# EAGLE board MD2019 (EAGLE 9.3.1)
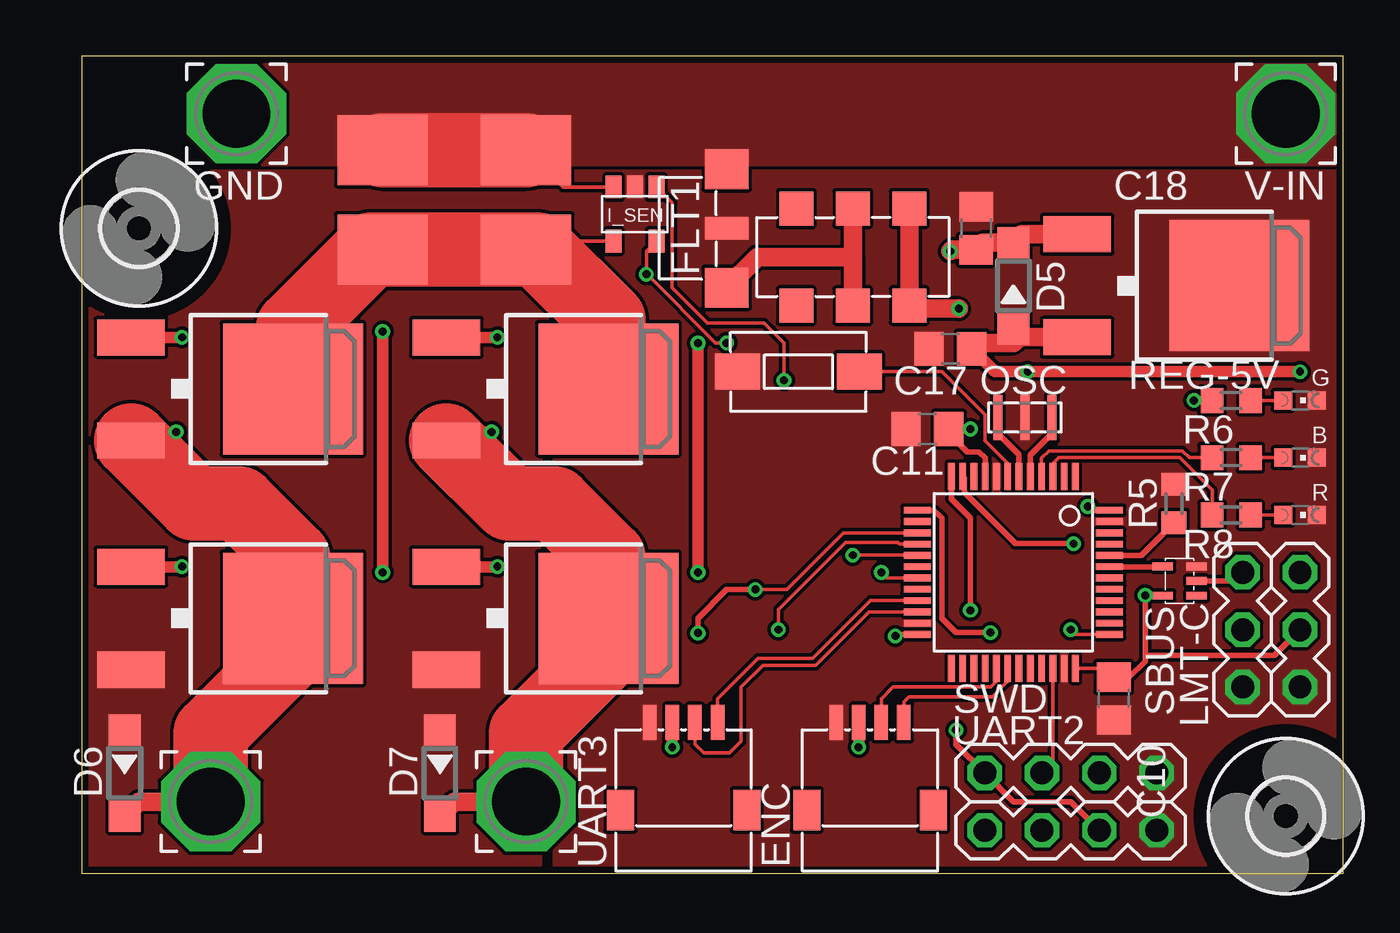
[diagram p0: board, top side]
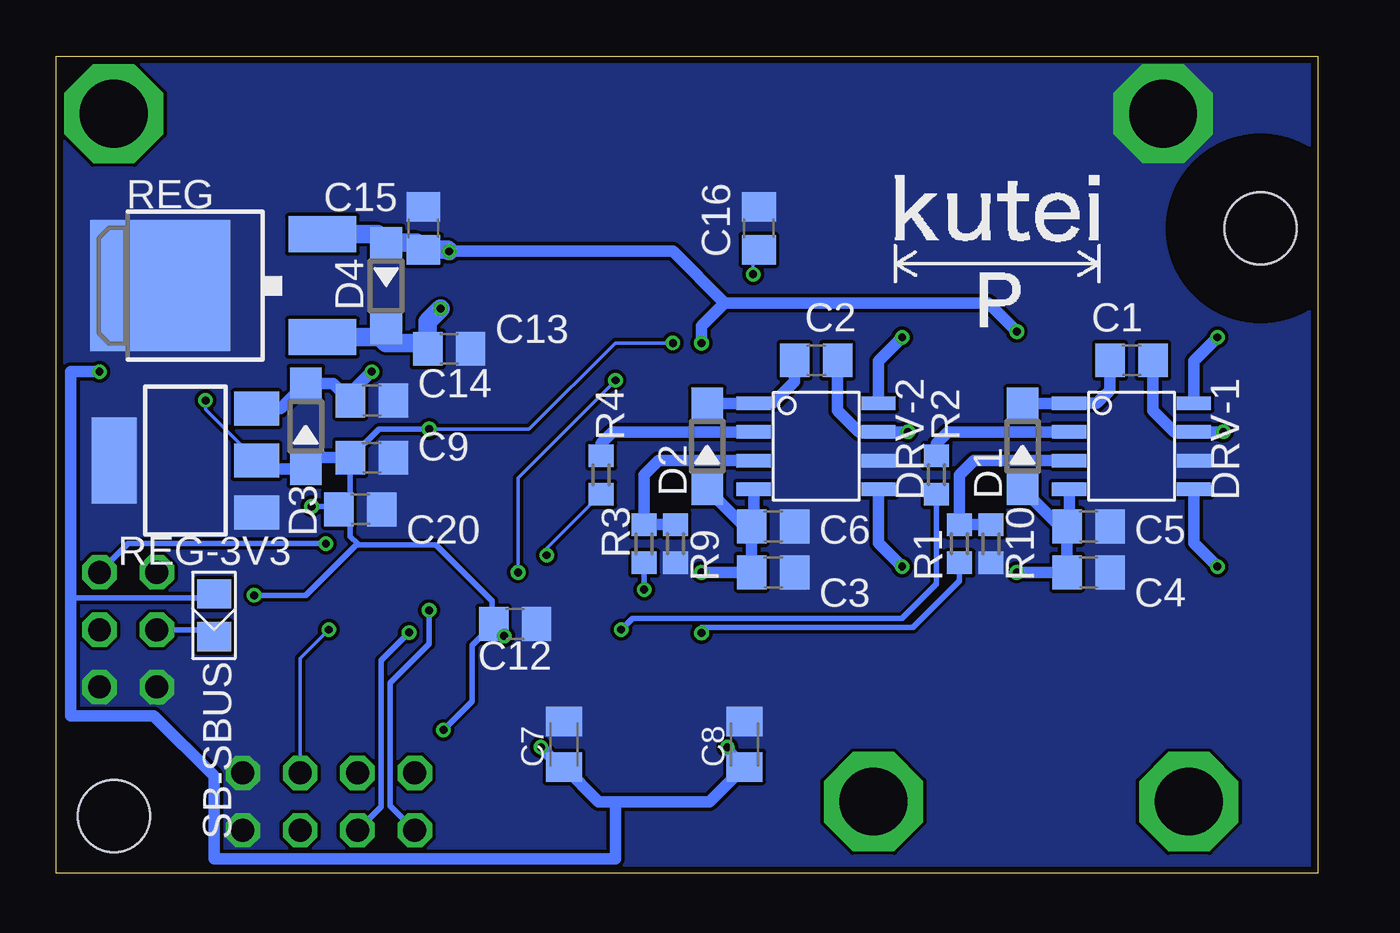
[diagram p1: board, bottom side, seen from below]

Size 55.88 x 36.2 mm. Coordinates in mm from the lower left corner, seen from the top.
Outline: 0,0 55.88,0 55.88,36.2 0,36.2 0,0
Copper layers (1*16): Top 0.035mm / dielectric 1.5mm / Bottom 0.035mm
Design rules "SeeedStudio_2layer_DRU_no_angle_20180719": minimum track width 6mil, minimum drill 0.3mm, track to track 6mil, track to pad 6mil, pad to pad 6mil, via to via 6mil, smd to smd 0mil, copper to edge 0.3mm, drill to drill 12mil, minimum pad ring 0.15mm, minimum via ring 0.15mm, stop-mask expansion 2mil, vias tented up to drill 100mil, thermal gap 0.2mm

## Footprints (pad centres in the part's own frame; a part is rotated, then mirrored left to right if it is on the bottom)
C0805 = smd 1.3 x 1.5: 1 -0.95,0; 2 0.95,0
C0805K = smd 1.3 x 1.6: 1 -1,0; 2 1,0
SOD123 = smd 1.4 x 1.4: A 1.9,0; C -1.9,0
SOIC-8 = smd 0.6 x 1.52: P1 1.905,2.76; P2 0.635,2.76; P3 -0.635,2.76; P4 -1.905,2.76; P5 -1.905,-2.76; P6 -0.635,-2.76; P7 0.635,-2.76; P8 1.905,-2.76
JST-SH-4L = smd 0.6 x 1.55: P$1 -1.5,3; P$2 -0.5,3; P$3 0.5,3; P$4 1.5,3 | smd 1.2 x 1.8: P$5 -2.8,-0.875; P$6 2.8,-0.875
DPACK = smd 1.6 x 3: 1 -2.28,-4.8; 3 2.28,-4.8 | smd 5.8 x 6.2: 4 0,2.38
ACH4518-L = smd 1.75 x 1.94: P$1 -2.625,0; P$3 2.625,0 | smd 1 x 1.94: P$2 0,0
4,4/3,0 = drill 3 pad 4.4 octagon: 1 0,0
3,2 = hole 3.2: 0,0
SOT25 = smd 0.7 x 1: 1 -0.95,-1.2; 2 0,-1.2; 3 0.95,-1.2; 4 0.95,1.2; 5 -0.95,1.2
CHIPLED_0603 = smd 0.8 x 0.8: A 0,-0.75; C 0,0.75
MA03-1 = drill 1.016 octagon: 1 -2.54,0; 2 0,0; 3 2.54,0
CSTCE = smd 0.4 x 2: P$1 -1.2,0; P$2 1.2,0; P$3 0,0
SSSS213202 = smd 1.5 x 1.5: P$1 -2.5,-2.15; P$2 0,-2.15; P$3 2.5,-2.15; P$4 -2.5,2.15; P$5 0,2.15; P$6 2.5,2.15
R0603 = smd 1 x 1.1: 1 -0.85,0; 2 0.85,0
SOT223 = smd 1.5 x 2: 1 -2.3,-3.15; 2 0,-3.15; 3 2.3,-3.15 | smd 3.8 x 2: 4 0,3.15
CRE2512-R001 = smd 3.1 x 4: P$1 -2.2,0; P$2 2.2,0
SHORT-LAND = smd 1.3 x 1.5: FROM 0.95,0; TO -0.95,0
MA04-1 = drill 1.016 octagon: 1 -3.81,0; 2 -1.27,0; 3 1.27,0; 4 3.81,0
TACTILE-SMALL = smd 2 x 1.6: P$1 -2.7,0; P$2 2.7,0
CMPAK-5 = smd 0.35 x 0.9: P$1 -0.65,-0.75; P$2 0,-0.75; P$3 0.65,-0.75; P$4 0.65,0.75; P$5 -0.65,0.75
LQFP48_F103 = smd 0.3 x 1.2: P1 -2.75,-4.25; P2 -2.25,-4.25; P3 -1.75,-4.25; P4 -1.25,-4.25; P5 -0.75,-4.25; P6 -0.25,-4.25; P7 0.25,-4.25; P8 0.75,-4.25; P9 1.25,-4.25; P10 1.75,-4.25; P11 2.25,-4.25; P12 2.75,-4.25; P25 2.75,4.25; P26 2.25,4.25; P27 1.75,4.25; P28 1.25,4.25; P29 0.75,4.25; P30 0.25,4.25; P31 -0.25,4.25; P32 -0.75,4.25; P33 -1.25,4.25; P34 -1.75,4.25; P35 -2.25,4.25; P36 -2.75,4.25 | smd 1.2 x 0.3: P13 4.25,-2.75; P14 4.25,-2.25; P15 4.25,-1.75; P16 4.25,-1.25; P17 4.25,-0.75; P18 4.25,-0.25; P19 4.25,0.25; P20 4.25,0.75; P21 4.25,1.25; P22 4.25,1.75; P23 4.25,2.25; P24 4.25,2.75; P37 -4.25,2.75; P38 -4.25,2.25; P39 -4.25,1.75; P40 -4.25,1.25; P41 -4.25,0.75; P42 -4.25,0.25; P43 -4.25,-0.25; P44 -4.25,-0.75; P45 -4.25,-1.25; P46 -4.25,-1.75; P47 -4.25,-2.25; P48 -4.25,-2.75

## Placement (x,y rotation side)
C1  1uF  [C0805]  8.26,22.73 0 bottom
C2  1uF  [C0805]  22.22,22.73 0 bottom
C3  1uF  [C0805]  24.13,13.34 0 bottom
C4  1uF  [C0805]  10.16,13.34 0 bottom
C5  0u1F  [C0805]  10.16,15.37 0 bottom
C6  0u1F  [C0805]  24.13,15.37 0 bottom
C7  10u  [C0805K]  33.4,5.71 90 bottom
C8  10u  [C0805K]  25.4,5.71 90 bottom
C9  1uF  [C0805]  41.91,18.41 0 bottom
C10  0u1F  [C0805]  45.72,7.75 270 top
C11  0u1F  [C0805]  37.47,19.68 180 top
C12  0u1F  [C0805]  35.56,11.05 0 bottom
C13  0u33F  [C0805]  38.48,23.24 0 bottom
C14  1uF  [C0805]  41.91,20.95 0 bottom
C15  1uF  [C0805]  39.62,28.57 90 bottom
C16  0u1F  [C0805]  24.76,28.57 90 bottom
C17  1uF  [C0805]  38.48,23.24 180 top
C18  0u33F  [C0805]  39.62,28.57 90 top
C20  0u1F  [C0805]  42.42,16.13 0 bottom
D1  RB160M-30TR  [SOD123]  13.08,18.92 270 bottom
D2  RB160M-30TR  [SOD123]  27.05,18.92 270 bottom
D3  RB160M-30TR  [SOD123]  44.83,19.81 270 bottom
D4  RB160M-30TR  [SOD123]  41.27,26.04 90 bottom
D5  RB160M-30TR  [SOD123]  41.27,26.04 270 top
D6  RB160M-30TR  [SOD123]  1.91,4.45 90 top
D7  RB160M-30TR  [SOD123]  15.88,4.45 90 top
DRV-1  NCP3420-SOIC8  [SOIC-8]  8.26,18.92 90 bottom
DRV-2  NCP3420-SOIC8  [SOIC-8]  22.22,18.92 90 bottom
ENC  JST-SH-4L  [JST-SH-4L]  34.93,3.68 0 top
FET-1H  FET-N-DPAKDPACK  [DPACK]  6.99,21.46 270 top
FET-1L  FET-N-DPAKDPACK  [DPACK]  6.99,11.3 270 top
FET-2H  FET-N-DPAKDPACK  [DPACK]  20.95,21.46 270 top
FET-2L  FET-N-DPAKDPACK  [DPACK]  20.95,11.3 270 top
FLT1  EMI-ACHXX4518-L  [ACH4518-L]  28.57,28.57 270 top
GND  THROU-HOLE4,4/3,0  [4,4/3,0]  6.86,33.66 0 top
H1  MOUNT-HOLE3.2  [3,2]  53.34,2.54 0 top
H2  MOUNT-HOLE3.2  [3,2]  2.54,28.57 0 top
I_SEN  ZXCT108  [SOT25]  24.51,29.21 180 top
LED-B  OSBL1608C1A  [CHIPLED_0603]  53.98,18.41 270 top
LED-G  OSYG1608C1A  [CHIPLED_0603]  53.98,20.95 270 top
LED-R  OSHR1608C1A  [CHIPLED_0603]  53.98,15.88 270 top
LMT-C  MA03-1  [MA03-1]  53.98,10.79 90 top
OSC  CERALOCK  [CSTCE]  41.78,20.19 180 top
OUT1  THROU-HOLE4,4/3,0  [4,4/3,0]  5.71,3.17 0 top
OUT2  THROU-HOLE4,4/3,0  [4,4/3,0]  19.68,3.17 0 top
PWR-SW  SW-SPDT  [SSSS213202]  34.16,27.3 0 top
R1  100  [R0603]  15.88,14.61 90 bottom
R2  100  [R0603]  16.89,17.65 90 bottom
R3  100  [R0603]  29.84,14.61 90 bottom
R4  100  [R0603]  31.75,17.65 90 bottom
R5  10k  [R0603]  48.39,16.38 90 top
R6  1k  [R0603]  50.93,20.95 180 top
R7  1k  [R0603]  50.93,18.41 180 top
R8  1k  [R0603]  50.93,15.88 180 top
R9  10k  [R0603]  28.45,14.61 270 bottom
R10  10k  [R0603]  14.48,14.61 270 bottom
REG  MC7812CDTG  [DPACK]  48.9,26.04 90 bottom
REG-3V3  LD1117SXX  [SOT223]  50.16,18.29 90 bottom
REG-5V  MC7805BDTRKG  [DPACK]  48.9,26.04 270 top
RI-1  CRE2512-FZ-R001E-3  [CRE2512-R001]  19.68,29.84 270 top
RI-2  CRE2512-FZ-R001E-3  [CRE2512-R001]  13.34,29.84 270 top
SB-SBUS  SHORT-PINLAND  [SHORT-LAND]  48.9,11.43 90 bottom
SBUS  MA03-1  [MA03-1]  51.44,10.79 90 top
SWD  MA04-1  [MA04-1]  43.82,4.45 180 top
U$1  TACTILE-SMALL  [TACTILE-SMALL]  31.75,22.22 0 top
U$3  LOGOKUTEI2  [LOGO_KUTEI2]  19.18,22.73 0 bottom
U$4  INV-1  [CMPAK-5]  48.64,12.95 90 top
U$11  STM32F1038  [LQFP48_F103]  41.27,13.34 180 top
UART2  MA04-1  [MA04-1]  43.82,1.91 180 top
UART3  JST-SH-4L  [JST-SH-4L]  26.67,3.68 0 top
V-IN  THROU-HOLE4,4/3,0  [4,4/3,0]  53.34,33.66 0 top

## Library data of the parts
C1-C18 C20 = rcl; SPICEPREFIX: C
D1-D7 DRV-1 DRV-2 FET-1H FET-1L FET-2H FET-2L FLT1 GND I_SEN LMT-C OSC OUT1 OUT2 PWR-SW REG REG-3V3 REG-5V RI-1 RI-2 SB-SBUS SBUS SWD U$1 U$3 U$4 U$11 UART2 V-IN = My-Library
ENC UART3 = My-con
H1 H2 = holes
LED-B LED-G LED-R = led
R1-R4 R9 R10 = rcl; SPICEPREFIX: R
R5-R8 = rcl

## Nets
+3V3: C9.1 C10.1 C11.1 C12.1 C16.1 C20.1 D3.A I_SEN.5 LMT-C.2 R6.2 REG-3V3.2 SWD.4 U$4.P$5 U$11.P9 U$11.P24 U$11.P36 U$11.P48 UART2.2
+5V: C7.1 C8.1 C14.1 C17.1 D3.C D5.A ENC.P$2 REG-3V3.3 REG-5V.3 SB-SBUS.FROM UART3.P$2
+12V: C3.1 C4.1 C5.1 C6.1 C15.1 C18.1 D1.A D2.A D4.A D5.C DRV-1.P4 DRV-2.P4 REG-5V.1 REG.3
+24V: FLT1.P$1 I_SEN.3 RI-1.P$1 RI-2.P$1 V-IN.1
BOOT0: R5.1 U$11.P44
DGND: C3.2 C4.2 C5.2 C6.2 C7.2 C8.2 C9.2 C10.2 C11.2 C12.2 C13.2 C14.2 C15.2 C16.2 C17.2 C18.2 C20.2 D6.A D7.A DRV-1.P6 DRV-2.P6 ENC.P$1 FET-1L.3 FET-2L.3 FLT1.P$2 GND.1 I_SEN.2 LED-B.C LED-G.C LED-R.C LMT-C.1 OSC.P$3 R5.2 R9.2 R10.2 REG-3V3.1 REG-3V3.4 REG-5V.4 REG.4 SBUS.1 SWD.1 U$1.P$1 U$4.P$3 U$11.P8 U$11.P23 U$11.P35 U$11.P47 UART2.1 UART3.P$1
ENC-A: ENC.P$3 U$11.P29
ENC-B: ENC.P$4 U$11.P30
HIGH_SIDE: FET-1H.4 FET-2H.4 I_SEN.4 RI-1.P$2 RI-2.P$2
I_OUT: I_SEN.1 U$11.P19
IN1: R2.1 U$11.P16
IN2: R4.1 U$11.P17
LED-B: R7.2 U$11.P4
LED-R: R8.2 U$11.P3
LMT-C: LMT-C.3 U$11.P11
N$1: C1.2 D6.C DRV-1.P7 FET-1H.3 FET-1L.4 OUT1.1
N$2: C1.1 D1.C DRV-1.P1
N$3: DRV-1.P8 FET-1H.1
N$4: DRV-1.P5 FET-1L.1
N$5: C2.2 D7.C DRV-2.P7 FET-2H.3 FET-2L.4 OUT2.1
N$6: C2.1 D2.C DRV-2.P1
N$7: DRV-2.P2 R4.2
N$8: DRV-2.P8 FET-2H.1
N$9: DRV-2.P5 FET-2L.1
N$10: DRV-2.P3 R3.2 R9.1
N$11: DRV-1.P2 R2.2
N$12: DRV-1.P3 R1.2 R10.1
N$13: FLT1.P$3 PWR-SW.P$2 PWR-SW.P$5
N$14: SBUS.3 U$4.P$2
N$15: SB-SBUS.TO SBUS.2
N$17: LED-R.A R8.1
N$18: C13.1 D4.C PWR-SW.P$3 PWR-SW.P$6 REG.1
N$19: OSC.P$1 U$11.P5
N$20: OSC.P$2 U$11.P6
N$23: LED-G.A R6.1
N$24: LED-B.A R7.1
OUT_EN: R1.1 R3.1 U$11.P15
RST-MCU: U$1.P$2 U$11.P7
SBUS2: U$4.P$4 U$11.P43
SWCLK: SWD.2 U$11.P37
SWDIO: SWD.3 U$11.P34
UART1-TX: U$11.P42
UART2-RX: U$11.P13 UART2.3
UART2-TX: U$11.P12 UART2.4
UART3-RX: U$11.P22 UART3.P$3
UART3-TX: U$11.P21 UART3.P$4

## Tracks (layer width: path | path; a pad name or v marks a point on that pad's centre or on a via)
+3V3  (via drill 0.35)
  Top 0.152: v49.28,20.95 R6.2 | C10.1 45.33,9.09 U$11.P36 | v28.57,23.5 28.08,23.5 25.04,26.54 v25.02,26.54 25.02,27.57 I_SEN.5
  Top 0.254: v39.37,19.68 C11.1 38.41,19.5 39.24,18.67 39.75,18.67 40.02,18.39 U$11.P9 | v36.04,10.52 36.11,10.59 U$11.P24 | v44.58,16.26 44.75,16.08 U$11.P48 | U$4.P$5 47.88,12.32 v47.12,12.32 47.12,9.65 | LMT-C.2 52.83,9.65 47.12,9.65 | v38.73,6.35 38.73,5.71 SWD.4 41.27,3.17 43.82,3.17 UART2.2 | 47.12,9.65 47.12,9.4 46.42,8.7 C10.1
  Bottom 0.152: REG-3V3.2 49.28,20.55 v49.28,20.95 | v39.37,19.68 34.93,19.68 31.11,23.5 v28.57,23.5 | C16.1 25.02,27.37 v25.02,26.54
  Bottom 0.254: v39.37,19.68 41.59,19.68 C9.1 42.86,16.19 | 42.86,16.19 42.86,14.92 42.55,14.61 | 42.86,16.19 42.92,16.13 C20.1 43.52,16.26 v44.58,16.26 | 42.55,14.61 42.48,14.54 39.05,14.54 36.58,12.06 36.58,11.05 C12.1 | C12.1 36.3,10.77 v36.04,10.52 | 42.55,14.61 44.83,12.32 v47.12,12.32 | C12.1 37.47,10.09 37.47,7.62 v38.73,6.35
  Bottom 0.508: REG-3V3.2 46.64,17.91 D3.A 44.33,18.41 C9.1
+5V  (via drill 0.35)
  Top 0.508: C17.1 40.45,22.22 v41.91,22.22 v53.98,22.22 | v34.42,5.59 v34.43,5.6 ENC.P$2 | v26.16,5.59 UART3.P$2
  Top 0.813: C17.1 39.69,23.49 41.27,23.49 | 41.27,23.49 D5.A | REG-5V.3 41.54,23.75 41.27,23.49
  Bottom 0.254: SB-SBUS.FROM 49.08,12.19 55.25,12.19
  Bottom 0.508: v41.91,22.22 42.86,21.27 C14.1 43.62,21.71 D3.C 45.96,20.59 REG-3V3.3 | v53.98,22.22 55.25,22.22 55.25,12.19 55.25,6.99 51.56,6.99 48.9,4.32 48.9,0.64 31.11,0.64 31.11,3.17 | 31.11,3.17 31.86,3.17 C7.1 33.54,4.71 v34.42,5.59 | 31.11,3.17 26.94,3.17 C8.1 26.16,5.48 v26.16,5.59
+12V  (via drill 0.35)
  Top 0.508: v13.34,13.34 v13.34,24 | v27.3,13.34 v27.3,23.49
  Top 0.813: REG-5V.1 41.66,28.31 D5.C 39.93,27.93 C18.1 38.55,27.62 v38.48,27.56
  Bottom 0.508: C5.1 C4.1 v13.34,13.34 | C5.1 11.02,15.46 DRV-1.P4 | C5.1 11.43,15.37 D1.A | DRV-2.P4 24.98,15.46 C6.1 | C6.1 25.39,15.37 D2.A | C6.1 C3.1 v27.3,13.34 | v27.3,23.49 27.3,24.26 26.29,25.27 | 26.29,25.27 28.57,27.56 v38.48,27.56 | v13.34,24 14.61,25.27 26.29,25.27
  Bottom 0.813: REG-5V.1 41.66,28.31 D5.C 39.93,27.93 C18.1 38.55,27.62 v38.48,27.56
+24V
  Top 0.152: I_SEN.3 21.32,30.41 RI-1.P$1
  Top 3.302: RI-2.P$1 RI-1.P$1
  pour Top (rank 4, no thermals): -0.64,36.2 -0.64,31.11 59.05,31.11 59.05,36.2
BOOT0
  Top 0.254: R5.1 46.94,14.09 U$11.P44
DGND
  pour Bottom (isolate 0.127, no thermals): -3.17,36.2 56.52,36.2 56.52,-1.91 -3.17,-1.91
  pour Top (no thermals): 20.95,31.11 57.79,31.11 57.79,-0.64 20.95,-0.64
  pour Top (rank 3, no thermals): 20.32,-0.64 20.32,19.68 20.95,19.68 20.95,31.11 -1.91,31.11 -1.91,-0.64
ENC-A
  Top 0.152: U$11.P29 40.52,8.51 40.27,8.26 35.94,8.26 35.43,7.74 ENC.P$3
ENC-B
  Top 0.152: U$11.P30 41.02,8.51 40.9,8.39 40.34,7.82 37.57,7.82 36.65,7.82 36.43,7.6 ENC.P$4
HIGH_SIDE
  Top 0.152: I_SEN.4 20.05,28.01 RI-1.P$2
  Top 3.302: FET-1H.4 9.37,24.18 12.83,27.64 RI-2.P$2 RI-1.P$2 20.19,27.64 23.33,24.5 FET-2H.4
I_OUT  (via drill 0.35)
  Top 0.152: I_SEN.1 26.16,29.71 26.16,25.96 27.73,24.39 30.22,24.39 31.11,23.49 v31.11,21.84 | v35.43,13.34 35.68,13.09 U$11.P19
  Bottom 0.152: v31.11,21.84 35.43,17.53 v35.43,13.34
IN1  (via drill 0.35)
  Top 0.152: U$11.P16 36.24,14.59 36.17,14.65 33.83,14.65 30.86,11.68 v30.86,10.79
  Bottom 0.254: R2.1 16.89,12.83 18.41,11.3 30.35,11.3 v30.86,10.79
IN2  (via drill 0.35)
  Top 0.152: v34.16,14.1 37.01,14.1 U$11.P17
  Bottom 0.152: v34.16,14.1 34.16,14.39 R4.1
LED-B
  Top 0.152: U$11.P4 42.52,18.39 42.85,18.72 48.77,18.72 49.07,18.41 R7.2
LED-R
  Top 0.152: U$11.P3 43.02,18.16 43.28,18.41 47.62,18.41 48.64,18.41 50.08,16.98 R8.2
LMT-C  (via drill 0.35)
  Top 0.254: U$11.P11 39.1,17.51 39.1,16.87 41.36,14.61 v43.94,14.61
  Bottom 0.254: v43.94,14.61 52.71,14.61 LMT-C.3
N$1  (via drill 0.35)
  Top 0.508: v4.19,19.56 3.82,19.18 FET-1H.3
  Top 0.813: OUT1.1 2.54,3.17 D6.C
  Top 3.302: FET-1H.3 4.99,16.38 6.99,16.38 9.37,14 FET-1L.4 9.53,11.14 9.53,10.03 5.71,6.22 OUT1.1
  Bottom 0.508: v4.19,19.56 DRV-1.P7 6.35,19.56 7.31,20.51 C1.2
N$2
  Bottom 0.508: C1.1 9.21,21.4 9.78,20.83 DRV-1.P1 D1.C
N$3  (via drill 0.35)
  Top 0.508: v4.45,23.75 FET-1H.1
  Bottom 0.508: DRV-1.P8 5.5,22.7 v4.45,23.75
N$4  (via drill 0.35)
  Top 0.508: FET-1L.1 v4.44,13.58 v4.45,13.59
  Bottom 0.508: v4.45,13.59 5.5,14.64 DRV-1.P5
N$5  (via drill 0.35)
  Top 0.508: v18.16,19.56 16.53,19.56 FET-2H.3
  Top 0.813: OUT2.1 16.5,3.17 D7.C
  Top 3.302: FET-2H.3 18.95,16.38 20.95,16.38 23.33,14 FET-2L.4 23.49,11.14 23.49,10.03 19.68,6.22 OUT2.1
  Bottom 0.508: v18.16,19.56 DRV-2.P7 20.32,19.56 21.27,20.51 C2.2
N$6
  Bottom 0.508: C2.1 23.17,21.78 24.13,20.83 DRV-2.P1 D2.C
N$7
  Bottom 0.508: DRV-2.P2 31.24,19.56 31.75,19.05 R4.2
N$8  (via drill 0.35)
  Top 0.508: v18.41,23.75 FET-2H.1
  Bottom 0.508: DRV-2.P8 19.46,22.7 v18.41,23.75
N$9  (via drill 0.35)
  Top 0.508: FET-2L.1 v18.41,13.58 v18.41,13.59
  Bottom 0.508: v18.41,13.59 19.46,14.64 DRV-2.P5
N$10
  Bottom 0.508: DRV-2.P3 29.21,18.29 29.84,17.65 R3.2 R9.1
N$11
  Bottom 0.508: DRV-1.P2 16.38,19.56 16.89,19.05 R2.2
N$12
  Bottom 0.508: DRV-1.P3 15.24,18.29 15.88,17.65 R1.2 R10.1
N$13
  Top 0.813: FLT1.P$3 29.93,27.3 34.16,27.3 | 34.16,27.3 PWR-SW.P$5 | 34.16,27.3 PWR-SW.P$2
N$14
  Top 0.254: U$4.P$2 51.05,12.95 SBUS.3
N$15
  Bottom 0.254: SB-SBUS.TO 49.21,10.79 SBUS.2
N$17
  Top 0.152: R8.1 LED-R.A
N$18  (via drill 0.35)
  Top 0.813: PWR-SW.P$6 PWR-SW.P$3 36.8,25.02 v38.86,25.02
  Bottom 0.813: v38.86,25.02 39.43,24.45 C13.1 39.69,23.49 41.27,23.49 | 41.27,23.49 D4.C | REG.1 41.54,23.75 41.27,23.49
N$19
  Top 0.254: OSC.P$1 42.98,19.49 42.02,18.53 U$11.P5
N$20
  Top 0.254: OSC.P$2 40.58,19.49 41.52,18.55 U$11.P6
N$23
  Top 0.152: R6.1 LED-G.A
N$24
  Top 0.152: R7.1 LED-B.A
OUT_EN  (via drill 0.35)
  Top 0.152: U$11.P15 33.75,15.09 31.24,12.57 v29.84,12.57
  Top 0.254: v29.84,12.57 28.57,12.57 27.3,11.3 v27.3,10.64
  Bottom 0.254: R1.1 15.88,12.95 17.93,10.9 27.3,10.9 v27.3,10.64 | R3.1 v29.84,12.57
RST-MCU
  Top 0.152: U$11.P7 41.02,18.16 40.77,18.41 40.01,19.18 40.01,20.32 38.1,22.22 U$1.P$2
SBUS2
  Top 0.254: U$4.P$4 47.87,13.59 U$11.P43
SWCLK  (via drill 0.35)
  Top 0.152: v43.82,10.79 44.02,10.59 U$11.P37
  Bottom 0.152: v43.82,10.79 45.09,9.53 SWD.2
SWDIO
  Top 0.152: U$11.P34 43.02,4.92 SWD.3
UART2-RX  (via drill 0.35)
  Top 0.254: v40.26,10.67 38.73,10.67 38.1,11.3 38.1,15.75 37.76,16.08 U$11.P13
  Bottom 0.254: UART2.3 41.5,2.95 41.5,9.43 v40.26,10.67
UART2-TX  (via drill 0.35)
  Top 0.254: v39.37,11.65 39.37,15.75 38.52,16.59 U$11.P12
  Bottom 0.254: UART2.4 41.09,2.99 41.09,8.44 39.37,10.16 v39.37,11.65
UART3-RX
  Top 0.152: UART3.P$3 27.17,5.72 27.56,5.33 28.7,5.33 29.21,5.84 29.21,8.26 30.17,9.22 32.51,9.22 34.88,11.59 U$11.P22
UART3-TX
  Top 0.152: UART3.P$4 28.17,7.72 29.97,9.53 32.39,9.53 34.95,12.09 U$11.P21

## Text on the board
tPlace: G | B | R